# EAGLE board d44a026b7da10f30edd61cf000385b1e (EAGLE 7.5.0)
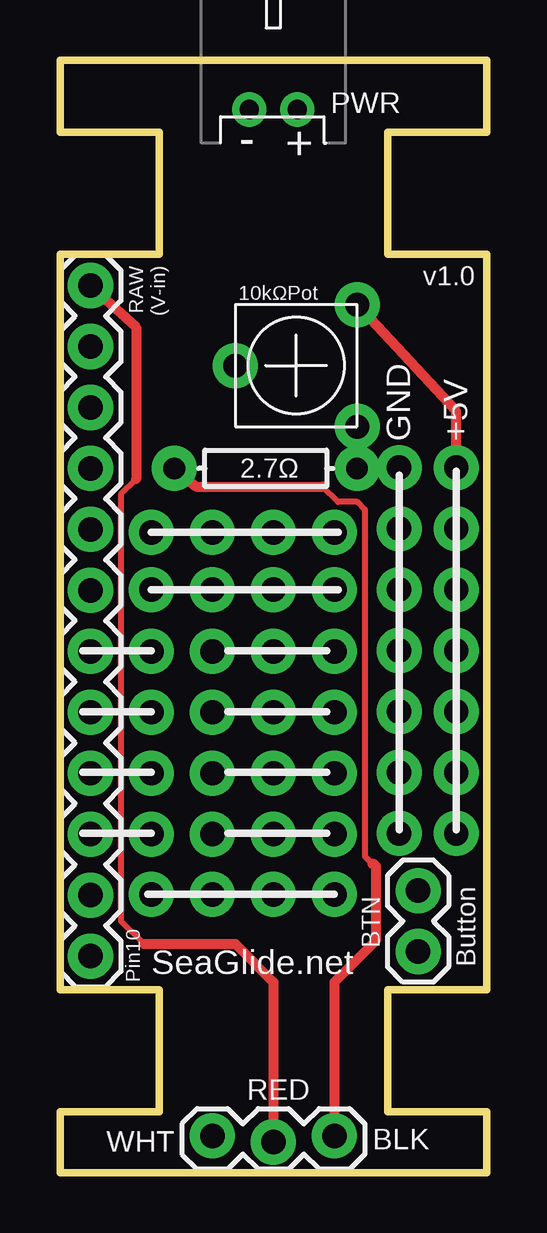
[diagram p0: board, top side]
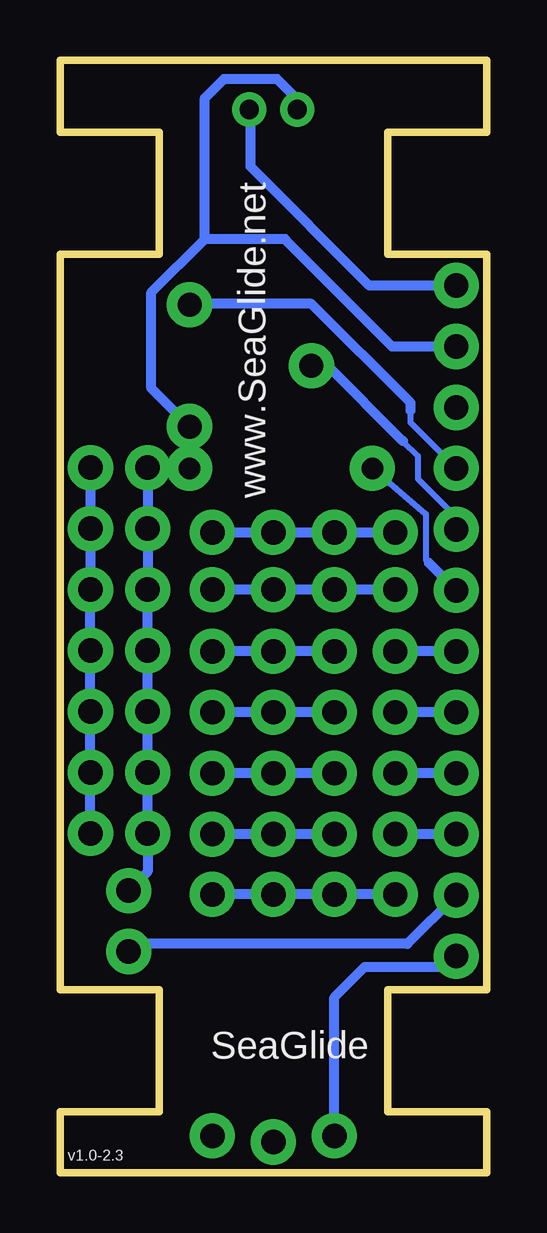
[diagram p1: board, bottom side, seen from below]

Size 17.78 x 46.35 mm. Coordinates in mm from the lower left corner, seen from the top.
Outline: 0,38.26 0,7.62 4.13,7.62 4.13,2.54 0,2.54 0,0 17.78,0 17.78,2.54 13.65,2.54 13.65,7.62 17.78,7.62 17.78,38.26 13.65,38.26 13.65,43.34 17.78,43.34 17.78,46.35 0,46.35 0,43.34 4.13,43.34 4.13,38.26 0,38.26
Copper layers (1*16): Top 0.0356mm / dielectric 1.5011mm / Bottom 0.0356mm
Design rules "LaenPCBOrder": minimum track width 6mil, minimum drill 13mil, track to track 6mil, track to pad 6mil, pad to pad 6mil, via to via 6mil, smd to smd 6mil, copper to edge 15mil, drill to drill 6mil, minimum pad ring 7mil, minimum via ring 7mil, stop-mask expansion 3mil, vias tented up to drill 0mil, thermal gap 10mil

## Footprints (pad centres in the part's own frame; a part is rotated, then mirrored left to right if it is on the bottom)
JST-PH-2-THM-RA = drill 0.8 pad 1.422: 1 1,0; 2 -1,0
1X04_NO_SILK_ALL_ROUND = drill 1.016 pad 1.88: 1 0,0; 2 2.54,0; 3 5.08,0; 4 7.62,0
1X03_LOCK = drill 1.016 pad 1.88: 1 0,0.127; 2 2.54,-0.127; 3 5.08,0.127
1X12 = drill 1.016 pad 1.88: 1 0,0; 2 2.54,0; 3 5.08,0; 4 7.62,0; 5 10.16,0; 6 12.7,0; 7 15.24,0; 8 17.78,0; 9 20.32,0; 10 22.86,0; 11 25.4,0; 12 27.94,0
1X07_NO_SILK = drill 1.016 pad 1.88: 1 0,0; 2 2.54,0; 3 5.08,0; 4 7.62,0; 5 10.16,0; 6 12.7,0; 7 15.24,0
1X02 = drill 1.016 pad 1.88: 1 0,0; 2 2.54,0
TRIM_POT_PTH = drill 1 pad 1.88: 1 -2.54,-2.54; 2 0,2.54; 3 2.54,-2.54
AXIAL-0.3EZ = drill 0.9 pad 1.88: P$1 -3.81,0; P$2 3.81,0

## Placement (x,y rotation side)
CN1  [JST-PH-2-THM-RA]  8.89,44.29 0 top
JP2  [1X04_NO_SILK_ALL_ROUND]  11.43,16.64 180 top
JP3  [1X03_LOCK]  6.35,1.4 0 top
JP4  [1X04_NO_SILK_ALL_ROUND]  11.43,19.18 180 top
JP5  [1X04_NO_SILK_ALL_ROUND]  11.43,14.1 180 top
JP6  [1X04_NO_SILK_ALL_ROUND]  11.43,21.72 180 top
JP7  [1X12]  1.27,9.02 90 top
JP8  [1X04_NO_SILK_ALL_ROUND]  3.81,11.59 0 top
JP9  [1X07_NO_SILK]  14.13,14.13 90 top
JP10  [1X07_NO_SILK]  16.51,14.13 90 top
JP11  [1X02]  14.92,11.75 270 top
JP12  [1X04_NO_SILK_ALL_ROUND]  3.81,24.29 0 top
JP13  [1X04_NO_SILK_ALL_ROUND]  3.81,26.67 0 top
R1  10kΩPot  [TRIM_POT_PTH]  9.84,33.62 90 top
R2  2.7Ω  [AXIAL-0.3EZ]  8.57,29.34 0 top

## Library data of the parts
CN1 = adafruit
JP2-JP13 = SparkFun-Connectors
R1 = SparkFun-Electromechanical
R2 = SparkFun-Passives

## Nets
5V: JP7.9 JP10.1 JP10.2 JP10.3 JP10.4 JP10.5 JP10.6 JP10.7 R1.3
A0: JP4.4 JP7.5
A1: JP6.4 JP7.6
A2: JP3.3 JP7.7 R2.P$1
D10: JP3.1 JP7.1
D11: JP7.2 JP11.2
D12: JP5.4 JP7.3
D13: JP2.4 JP7.4
GND: CN1.2 JP7.11 JP9.1 JP9.2 JP9.3 JP9.4 JP9.5 JP9.6 JP9.7 JP11.1 R1.1 R2.P$2
N$1: JP8.1 JP8.2 JP8.3 JP8.4
N$2: JP4.1 JP4.2 JP4.3
N$3: JP7.8 R1.2
N$4: JP13.1 JP13.2 JP13.3 JP13.4
N$5: JP12.1 JP12.2 JP12.3 JP12.4
N$8: JP5.1 JP5.2 JP5.3
N$9: JP2.1 JP2.2 JP2.3
N$13: JP6.1 JP6.2 JP6.3
RST: JP7.10
VRAW: CN1.1 JP3.2 JP7.12

## Tracks (layer width: path | path; a pad name or v marks a point on that pad's centre or on a via)
5V
  Top 0.406: JP10.7 16.51,31.72 R1.3
  Bottom 0.254: JP7.9 3.17,31.24 3.17,31.75
  Bottom 0.406: JP10.1 JP10.2 JP10.3 JP10.4 JP10.5 JP10.6 JP10.7 | 3.17,31.75 3.17,32.07 7.3,36.2 12.35,36.2 R1.3
A0
  Bottom 0.406: JP7.5 JP4.4
A1
  Bottom 0.406: JP7.6 JP6.4
A2
  Top 0.254: 13.02,12.86 12.7,13.18 12.7,27.62 12.38,27.94 11.59,27.94 10.95,28.58
  Top 0.406: JP3.3 11.43,7.94 13.18,9.68 13.18,12.7 arc90 13.02,12.86 | R2.P$1 5.68,28.58 10.95,28.58
  Bottom 0.254: R2.P$1 2.54,27.43 2.54,25.53 2.41,25.4
  Bottom 0.406: JP7.7 2.41,25.4
D10
  Bottom 0.406: JP3.1 6.35,7.3 5.08,8.57 1.71,8.57 JP7.1
D11
  Bottom 0.406: JP7.2 3.3,9.53 15.08,9.53 JP11.2
D12
  Bottom 0.406: JP7.3 JP5.4
D13
  Bottom 0.406: JP7.4 JP2.4
GND
  Bottom 0.406: 11.75,38.89 11.75,44.77 10.95,45.56 8.73,45.56 7.89,44.72 CN1.2 | JP7.11 3.94,34.42 8.41,38.89 11.75,38.89 | 11.75,38.89 13.97,36.67 13.97,32.67 R1.1 R2.P$2 14.1,29.34 JP9.7 JP9.6 JP9.5 JP9.4 JP9.3 JP9.2 JP9.1 14.13,12.54 JP11.1
N$1
  Bottom 0.406: JP8.1 JP8.2 JP8.3 JP8.4
N$2
  Bottom 0.406: JP4.3 JP4.2 JP4.1
N$3
  Bottom 0.254: JP7.8 1.27,27.31 2.86,28.89 2.86,29.85 3.49,30.48
  Bottom 0.406: 3.49,30.48 6.67,33.66 R1.2
N$4
  Bottom 0.406: JP13.4 JP13.3 JP13.2 JP13.1
N$5
  Bottom 0.406: JP12.1 JP12.2 JP12.3 JP12.4
N$8
  Bottom 0.406: JP5.3 JP5.2 JP5.1
N$9
  Bottom 0.406: JP2.3 JP2.2 JP2.1
N$13
  Bottom 0.406: JP6.3 JP6.2 JP6.1
VRAW
  Top 0.254: 3.49,9.53 2.54,10.48 2.54,28.26 3.17,28.89
  Top 0.406: 3.49,9.53 7.3,9.53 8.89,7.94 JP3.2 | JP7.12 3.17,35.21 3.17,28.89
  Bottom 0.406: JP7.12 4.89,36.96 9.84,41.91 9.84,44.24 CN1.1

## Text on the board
tPlace: PWR | RAW / (V-in) | v1.0 | GND | +5V | BTN | SeaGlide.net | Button | Pin10 | RED | WHT | BLK
bPlace: www.SeaGlide.net | SeaGlide | v1.0-2.3